# Altium PCB TRUMAN_PCB.PcbDoc (part 5 of 5)
Units mil, origin at the board's own origin, x right, y up, seen from the top; angles counter-clockwise.
Board outline 8050 x 5340 mil, 2 copper layers (Top Layer, Bottom Layer); 272 components, 210 nets, 840 pads, 280 vias.
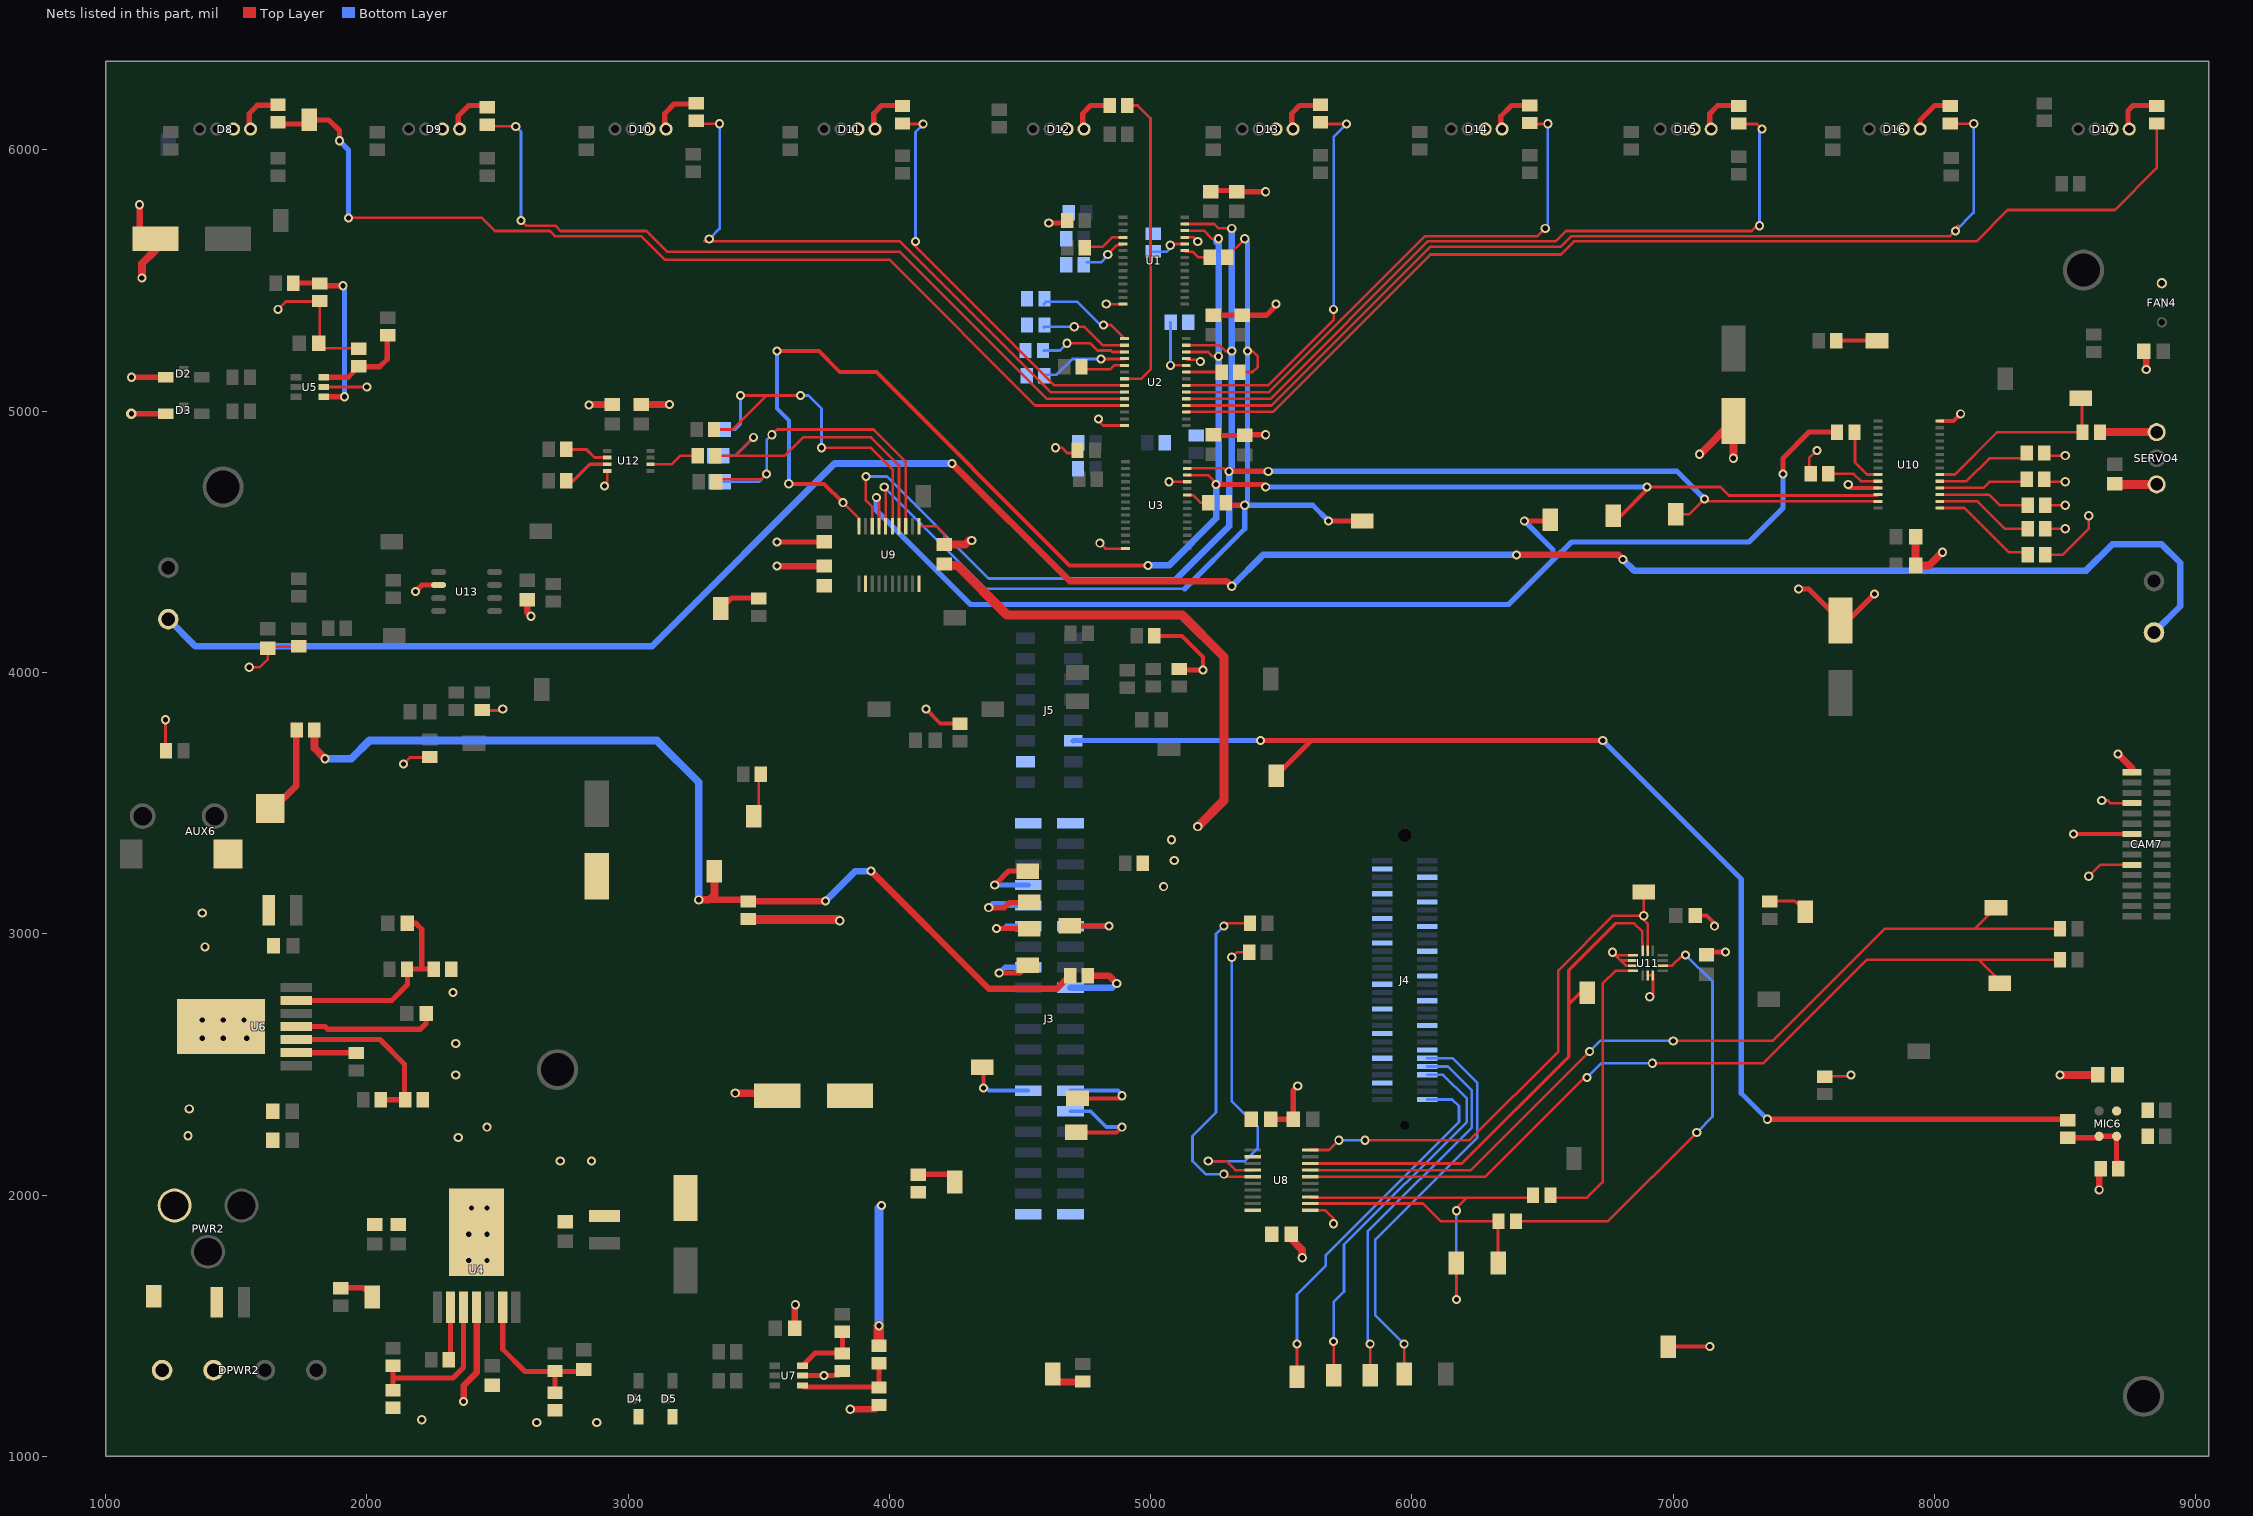
[diagram p3: the nets of this part, all layers, seen from the top]

## Via types
v1: diameter 35, hole 20, Top Layer to Bottom Layer, 278 vias
v2: diameter 40, hole 20, Top Layer to Bottom Layer, 1 vias
v3: diameter 45, hole 25, Top Layer to Bottom Layer, 1 vias

## Nets (pads, with @x,y where several pads share a name; then routed paths per layer and width w, separated by ;. In a path a pad name is that pad's centre, name@x,y a point inside that pad or via, vN(x,y) a via of type N, cw(c..) or ccw(c..) an arc to the next point about the centre after c; other vN are vias at no path point) (continued)
GA3: R6.2 U1.4 | length 160.6
  Top Layer w10: R6.2@4750,5625 4755,5630 4816.57,5630 4852.16,5665.59 U1.4@4893.78,5665.59
GA4: R9.2 U1.5 | length 176.6
  Top Layer w10: v1(4835.52,5600) 4870.83,5635.31 4875.31,5635.31 4880,5640 4880,5635.31 4889.09,5635.31 U1.5@4893.78,5640
  Bottom Layer w10: R9.2@4755.43,5570 4810,5570 4835.52,5595.52 v1(4835.52,5600)
GA5: R8.1 U1.24 | length 138.3
  Top Layer w10: v1(5075,5635) 5080,5640 U1.24@5130,5640
  Bottom Layer w10: R8.1@5010,5610 5060,5610 5075,5625 v1(5075,5635)
GI1: R67.1 U11.4 | length 1124.5
  Top Layer w10: R67.1@6530,2000 6540,1990 6670,1990 6730,2050 6730,2810 6778.39,2858.39 U11.4@6845.51,2858.39
GI2: R68.2 U11.9 | length 1682.2
  Top Layer w10: R68.2@6400,1900 6750,1900 v1(7090,2240) ; U11.9@6959.69,2878.07 6995.95,2878.07 7037.14,2919.25 v1(7047.32,2919.25)
  Bottom Layer w10: v1(7047.32,2919.25) 7150,2816.57 7150,2300 v1(7090,2240)
GND: AUX6.2 C1.1 C2.1 C3.1 C4.1 C5.1 C6.1 C7.2 C8.2 C9.2 C10.2 C11.2 C12.1 C13.1 C14.1 C16.1 C17.1 C18.1 C20.1 C21.1 C22.1 C23.1 C24.1 C25.1 C26.2 C27.2 C28.1 C29.1 C30.2 C31.2 C32.1 C33.1 C36.1 C37.1 C38.2 C39.1 C40.1 C41.1 C42.2 C43.1 C45.1 C46.1 C47.2 CAM7.1 CAM7.4 CAM7.7 CAM7.10 D2.1 D3.1 D4.1 D5.1 D8.2 D9.2 D10.2 D11.2 D12.2 D13.2 D14.2 D15.2 D16.2 D17.2 DPWR2.3 DPWR2.4 FAN4.3 GND1.1 GND.1 J3.1 J3.2 J3.39 J3.40 J4.6 J4.12 J4.13 J4.18 J4.19 J4.24 J4.25 J4.30 J4.31 J4.37 J4.40 J4.43 J4.46 J4.49 J4.52 J4.55 J4.58 J5.4 PWR2.2 R1.1 R2.1 R3.1 R4.1 R5.1 R7.1 R8.2 R9.1 R10.1 R12.2 R15.1 R16.1 R18.1 R19.2 R20.1 R29.2 R32.1 R33.1 R34.1 R39.2 R43.1 R45.1 R47.1 R54.2 R55.2 R56.1 R57.1 R58.1 R59.1 R60.1 R61.1 R62.1 R63.2 R71.1 R75.1 R80.1 R87.1 R122.1 SERVO4.3 U1.14 U1.25 U2.14 U2.25 U3.14 U3.25 U4.4 U4.8 U5.5 U6.4 U6.8 U7.5 U8.11 U9.11 U10.14 U10.25 U11.1 U11.2 U11.3 U11.6 U11.7 U12.4 U13.6 | length 10240.7
  Top Layer w10: R54.2@1229.13,3700 v1(1229.13,3819.13) v1@1230,3820 ; v1(1550,4020) 1590,4020 1620,4050 C43.1@1620,4092.6 1626.54,4099.13 R75.1@1740,4099.13 ; v1(1660,5390) 1690,5420 1819,5420 1819,5262.6 C18.1@1816.4,5260 1835.54,5240.87 R32.1@1969,5240.87 ; U5.5@1835.3,5092.6 v1(2000,5092.6) ; v1(2140,3650) 2164.57,3674.57 R71.1@2240,3674.57 ; R80.1@2441.61,3854.57 2514.57,3854.57 v1(2520,3860) ; v1(2910,4713.82) 2920,4723.82 U12.4@2920,4771.61 ; U9.11@4113.54,4560 4180,4560 4210,4530 C33.1@4210,4490 ; v1(4635.93,4860.28) 4659.72,4860.28 4680,4840 R16.1@4719.35,4840 ; v1@4803.32,4959.21 4817.25,4945.28 U2.14@4900,4945.28 ; v1(4805.39,4495) 4826.29,4474.09 U3.14@4903.78,4474.09 ; v1(4830,5410) 4893.46,5410 U1.14@4893.78,5409.68 ; v1(5070,4730) U3.25@5140,4730 ; U1.25@5130,5665.59 5164.41,5665.59 v1(5180,5650) ; U2.25@5136.22,5201.18 5140.91,5196.5 5183.5,5196.5 v1(5190,5190) ; U8.11@5610.47,1942.05 5667.95,1942.05 5700,1910 v1(5700,1890) ; v1(6767.32,2929.25) v1@6779.13,2917.44 ; U11.3@6845.51,2878.07 6818.5,2878.07 6798.82,2897.76 ; U11.2@6845.51,2897.76 6798.82,2897.76 ; U11.1@6845.51,2917.44 v1@6779.13,2917.44 ; U11.6@6902.6,2840.67 U11.7@6922.28,2840.67 ; v1(6910,2758.81) 6922.6,2771.41 U11.7@6922.6,2842.91 ; R63.2@7520.26,4770.81 7520.26,4820.26 v1(7550,4850) ; R57.1@7580,2455.43 7675.43,2455.43 v1(7680,2460) ; R62.1@8420,4830 v1(8500,4830) ; R58.1@8420.87,4460 8430.87,4450 8490,4450 8590,4550 v1(8590,4600) ; R61.1@8420.87,4730 v1(8500,4730) ; R59.1@8425.43,4550 v1(8500,4550) ; R60.1@8425.43,4640 v1(8500,4640) ; v1(8590,3220) 8633.78,3263.78 CAM7.10@8755.83,3263.78 ; v1(8640,3510) 8663.3,3510 8673.3,3500 CAM7.4@8755.83,3500 ; v1@6779.13,2917.44 6798.82,2897.76
  Top Layer w15: v1(4140,3860) 4194.57,3805.43 R55.2@4270,3805.43 ; R122.1@5015.43,4140 5120,4140 5200,4060 v1(5200,4010) ; GND.1@6980,1420 v1(7140,1420) ; C40.1@7084.8,3070 7126.46,3070 7157.32,3039.14 v1(7157.32,3029.25) ; v1(7670,4720) 7670,4706.46 U10.25@7783.78,4706.46 ; U10.14@8020,4962.36 8072.36,4962.36 v1(8100,4990) ; v1@8530,3380 v1(8531.89,3381.89) CAM7.7@8755.83,3381.89
  Top Layer w18: 2211.18,4335 U13.6@2274.33,4335
  Top Layer w20: v2(1099,4990) D3.1@1230.1,4990 ; v1(1099,5130) D2.1@1230.1,5130 ; U6.4@1730,2645 1840,2645 1850,2635 2205,2635 2226,2656 C24.1@2226,2685 ; v1(2186.18,4310) 2211.18,4335 ; v1@3580,4500 C32.1@3750,4500 ; U7.5@3667.19,1309.17 v1(3749.17,1309.17) 3804.6,1309.17 R45.1@3820,1324.57 ; v1(4610,5720) R3.1@4679.13,5720 ; R56.1@5100,4009.61 5100.39,4010 v1(5200,4010) ; C4.1@5239.96,5844.38 C1.1@5339.96,5844.38 ; C6.1@5240,4907.4 C5.1@5360,4907.4 ; C2.1@5240,5367.4 C3.1@5350,5367.4 5442.6,5367.4 5480,5404.8 v1(5480,5410) ; C1.1@5330,5840 v1(5440,5840) ; C5.1@5360,4910 v1(5440,4910) ; C27.2@5450,2290 C27.2@5460,2290 C28.1@5545.2,2290 5545.2,2400 v1(5562.6,2417.4) ; C41.1@7127.32,2919.25 7138.07,2930 v1(7200,2930) ; v1(7480,4320) 7518.78,4320 C7.2@7640,4198.78 7668.78,4198.78 v1(7770,4300)
  Top Layer w25: v1(1130,5790) 1130,5692.68 1162.68,5660 C10.2@1191.22,5660 ; v1(2370,1210) 2370,1270 2420,1320 U4.4@2420,1570 ; C45.1@2613.6,4277.99 2613.6,4229.96 v1(2628.17,4215.39) ; v1(2850,5023.82) 2851.97,5025.79 C46.1@2940,5025.79 ; C42.2@3050,5025.79 v1(3158.03,5025.79) v1@3160,5023.82 ; v1(3570,4407.4) C31.2@3750,4407.4 ; C25.1@3637.4,1490 3637.4,1577.4 v1(3640,1580) ; v1(3850,1180) 3945.43,1180 R47.1@3960,1194.57 ; v1@8634.57,2024.57 v1(8630,2020) 8630,2093.46 R87.1@8636.54,2100 ; v1(8701.98,3688.02) 8755.83,3634.17 CAM7.1@8755.83,3618.11 ; C38.2@8800,5230 8810,5220 v1(8810,5160)
  Top Layer w30: v1(1138.78,5510) 1138.78,5564.36 1191.22,5616.8 C10.2@1191.22,5660 ; v1(3410,2390) C30.2@3572.44,2390 ; C33.1@4210,4490 4290,4490 4305,4505 v1(4315,4505) ; C29.1@5537.4,1850 5537.4,1832.6 5580,1790 v1(5580,1760) ; v1(7100,4835.47) 7103.03,4835.47 C11.2@7230,4962.44 ; v1(7230,4820) C11.2@7230,4940 ; C37.1@7927.4,4520 C36.1@7927.4,4410 7980,4410 v1(8030,4460) ; v1(8480,2460) C47.2@8625.2,2460
  Top Layer w35: C39.1@8690,4722.6 8692.6,4720 SERVO4.3@8850,4720
  Bottom Layer w10: v2@1099,4980 v2(1099,4990)
  other v1: 2650,1130 2880,1130 2210,1140 2390,1750 2460,1750 2390,1850 2460,1850 2400,1950 2460,1950 2740,2130 2860,2130 2350,2220 1315,2227.08 2460,2260 1320,2330 2340,2460 2340,2580 1370,2600 1450,2600 1540,2600 1370,2670 1450,2670 1530,2670 2330,2775 1380,2950 1370,3080 3570,4500 4800,4970
GND_CFILT: codecgnd.1 J5.5 R86.1 | length 5067.9
  Top Layer w20: v1(5420,3740) 5610,3740 ; codecgnd.1@5480,3605 5610,3735 5610,3740 ; v1(6730,3740) 5610,3740 ; v1(7360,2290) 7530.87,2290 7530.43,2290.43 R86.1@8500,2290.43
  Bottom Layer w20: J5.5@4703.74,3738.03 4705.71,3740 v1(5420,3740) ; v1(6730,3740) 7260,3210 7260,2390 v1(7360,2290)
GPIO_D: D.1 J3.26 | length 243
  Top Layer w20: v1(4420,2850) 4500,2850 D.1@4530,2880
  Bottom Layer w20: v1(4420,2850) 4441.89,2871.89 J3.26@4531.5,2871.89
GPIO_G: G.1 J3.29 | length 297.3
  Top Layer w20: G.1@4690,3030 v1(4840,3030)
  Bottom Layer w20: J3.29@4692.91,3029.37 4839.37,3029.37 v1(4840,3030)
GPIO_H: H.1 J3.30 | length 250.4
  Top Layer w20: v1(4410,3020) H.1@4535,3020
  Bottom Layer w20: v1(4410,3020) 4440,3020 4449.37,3029.37 J3.30@4531.5,3029.37
GPIO_J: J3.32 J.1 | length 323.5
  Top Layer w20: v1(4380,3100) 4440,3100 4460,3120 J.1@4535,3120
  Bottom Layer w20: v1(4380,3100) 4394.55,3114.55 4441.67,3114.55 4448.11,3108.11 J3.32@4531.5,3108.11
GPIO_L: J3.34 L.1 | length 277.2
  Top Layer w20: v1(4403.15,3186.85) 4456.3,3240 L.1@4530,3240
  Bottom Layer w20: v1(4403.15,3186.85) J3.34@4531.5,3186.85
GYRO_INT1: GINT1.1 R67.2 U8.13 | length 1404.6
  Top Layer w10: U8.13@5610.47,1993.23 5613.7,1990 6210,1990 ; v1(6170,1600) GINT1.1@6170,1740 ; v1(6170,1940) 6170,1950 6210,1990 ; R67.2@6463.07,2000 6453.07,1990 6210,1990
  Bottom Layer w10: v1(6170,1600) v1(6170,1940)
GYRO_INT2: GINT2.1 R68.1 U8.12 | length 907
  Top Layer w10: U8.12@5610.47,1967.64 6042.36,1967.64 6110,1900 6329.13,1900 6329.13,1740.87 GINT2.1@6330,1740
heaphones_break: AUX6.3 R81.1 | length 350.5
  Top Layer w25: AUX6.3@1632.6,3469.53 1729.13,3566.06 R81.1@1729.13,3780
I2C0_SCL: SCL0.1 U8.20 U11.13 | length 2061.2
  Top Layer w10: U8.20@5610.47,2172.36 5682.36,2172.36 v1(5720,2210) ; v1(5820,2210) 6220,2210 6560,2550 6560,2860 6769.25,3069.25 v1(6887.32,3069.25) ; SCL0.1@6887.32,3160 v1(6887.32,3069.25) ; U11.13@6902.91,2935.16 6902.91,3037.09 6887.32,3052.68 v1(6887.32,3069.25)
  Bottom Layer w10: v1(5720,2210) v1(5820,2210)
I2C0_SDA: SDA0.1 U8.18 U11.14 | length 2036.3
  Top Layer w10: 6780,3040 6850,3040 6881.91,3008.09 6881.91,2963.66 ; U11.14@6882.91,2935.16 6882.91,2963.66
  Top Layer w12: U8.18@5610.47,2121.18 6191.18,2121.18 6600,2530 6600,2730 ; SDA0.1@6680,2790 6660,2790 6600,2730 ; 6780,3040 6600,2860 6600,2730
I2C1_SCL: SCL1.1 U1.26 U2.26 U3.26 U9.20 U10.26 | length 7196.2
  Top Layer w10: v1(3822.26,4650) 3883.23,4589.03 U9.20@3883.23,4560 ; U1.26@5130,5691.18 5203.84,5691.18 5235.02,5660 v1(5260,5660) ; U2.26@5136.22,5226.77 5219.68,5226.77 5236.46,5210 v1(5260,5210) ; U3.26@5140,4755.59 5218.94,4755.59 5250,4724.53 v1(5250,4720) ; v1(6900,4710) 7180,4710 7212.5,4677.5 7780.41,4677.5 U10.26@7783.78,4680.87
  Top Layer w15: v1(3570,5230) 3730,5230 3810,5150 3950,5150 4690,4410 v1(4990,4410) ; v1(3614.71,4722.26) 3750,4722.26 v1(3822.26,4650) ; SCL1.1@6770,4600 6800,4600 6900,4700 v1(6900,4710)
  Top Layer w20: v1(5250,4720) 5430,4720 v1(5440,4710)
  Bottom Layer w15: v1(3570,5230) 3570,5010 3615.65,4964.35 v1@3615.65,4723.21
  Bottom Layer w20: v1(5440,4710) v1(6900,4710)
  Bottom Layer w25: v1(4990,4410) 5070,4410 5250,4590 v1(5250,4720) 5260,4720 v1(5260,5210) 5260,5640 5250,5650 v1(5260,5660)
I2C1_SDA: SDA1.1 U1.27 U2.27 U3.27 U9.18 U10.27 | length 6169.2
  Top Layer w10: v1(3910,4750) 3910,4657.57 3934.41,4633.16 U9.18@3934.41,4560 ; U1.27@5130,5716.77 5243.23,5716.77 5260,5700 v1(5310,5700) ; U2.27@5136.22,5252.36 5136.22,5252.01 5263.95,5252.01 5285.96,5230 v1(5310,5230) ; U3.27@5140,4781.18 5278.82,4781.18 5290,4770 v1(5300,4770) ; SDA1.1@7010,4605 7060.98,4605 v1(7120,4664.02) 7128.75,4655.28 U10.27@7783.78,4655.28
  Top Layer w20: v1(5300,4770) v1@5440,4770
  Bottom Layer w10: v1(3910,4750) 3990,4750 4380,4360 5100,4360
  Bottom Layer w20: v1(5450,4770) 7014.02,4770 v1(7120,4664.02)
  Bottom Layer w25: 5100,4360 5300,4560 v1(5300,4770) 5310,4780 v1(5310,5230) v1(5310,5700)
I2C2_SCL: R88.1 SCL2.1 U8.17 | length 3385.6
  Top Layer w10: U8.17@5610.47,2095.59 6225.59,2095.59 v1(6680,2550) ; v1(7000,2590) 7380,2590 7810,3020 8155,3020 ; SCL2.1@8235,3100 8155,3020 ; R88.1@8500,3020 R88.1@8480,3020 8155,3020
  Bottom Layer w10: v1(6680,2550) 6720,2590 v1(7000,2590)
I2C2_SDA: R89.1 SDA2.1 U8.16 | length 3388
  Top Layer w10: U8.16@5610.47,2070 6280,2070 6660,2450 v1(6670,2450) ; v1(6920,2504.7) 7344.7,2504.7 7740,2900 8170,2900 ; SDA2.1@8280,2790 8170,2900 ; R89.1@8499.13,2900 R89.1@8480,2900 8170,2900
  Bottom Layer w10: v1(6670,2450) 6724.7,2504.7 v1(6920,2504.7)
LED_CNTRL: LEDCNTRL.1 R11.2 R14.2 R21.2 U9.16 | length 3730.4
  Top Layer w10: v1@3977.8,4702.2 v1@3980,4704.41 ; v1(3980,4710) v1@3980,4704.41 ; U9.16@3985.59,4560 3985.59,4694.41 3980,4700 v1@3980,4704.41 ; R11.2@5292.72,5592.72 v1(5360,5660) ; R14.2@5340.87,5150 5390,5150 5410,5170 5410,5210 5390,5230 v1(5370,5230)
  Top Layer w20: R21.2@5280,4650 5290,4640 v1(5360,4640) ; v1(5680,4580) LEDCNTRL.1@5810,4580
  Bottom Layer w10: v1(3980,4710) 4370,4320 5130,4320
  Bottom Layer w20: 5130,4320 5360,4550 v1(5360,4640) ; v1(5360,5660) 5370,5650 v1(5370,5230) 5370,4650 v1(5360,4640) ; v1(5680,4580) 5620,4640 v1(5360,4640)
LEDOEB: R21.1 U3.23 | length 81.1
  Top Layer w10: U3.23@5140,4678.82 5161.18,4678.82 5190,4650 R21.1@5209.13,4650
LEDOEG: R11.1 U1.23 | length 104.7
  Top Layer w10: U1.23@5130,5614.41 5134.69,5609.72 5161.73,5609.72 5181.46,5590 R11.1@5224.57,5590
LEDOER: R14.1 U2.23 | length 133.8
  Top Layer w10: U2.23@5136.22,5150 R14.1@5270,5150
LineIn_Detect: lineindet.1 R52.1 R81.2 R83.1 | length 3896.6
  Top Layer w25: 3310,3130 R83.1@3455.43,3130 ; R83.1@3460,3125.43 v1(3755.43,3125.43) ; v1(3930,3240) 4380,2790 4640,2790 R52.1@4690,2840
  Top Layer w30: R81.2@1800,3780 1800,3710 v1(1840,3670) ; v1(3270,3130) 3310,3130 3330,3150 lineindet.1@3330,3240 ; R83.1@3455.43,3130 R83.1@3460,3125.43
  Bottom Layer w25: v1(3755.43,3125.43) 3870,3240 v1(3930,3240)
  Bottom Layer w30: v1(1840,3670) 1940,3670 2010,3740 3110,3740 3270,3580 v1(3270,3130)
LINEIN_R: J3.23 R52.2 | length 305.6
  Top Layer w25: R52.2@4760.87,2840 4840,2840 v1(4870,2810)
  Bottom Layer w25: J3.23@4692.91,2793.15 4853.15,2793.15 v1(4870,2810)
LS_EXP_1P8: C27.1 C29.2 C30.1 C31.1 C33.2 FUSE3.1 R44.2 R53.1 R83.2 U8.2 U8.10 U9.2 U9.10 | length 2788.8
  Top Layer w35: R83.2@3460,3054.57 3805.43,3054.57 v1(3810,3050) ; C33.2@4224.01,4410 4260,4410 4450,4220 5120,4220 5280,4060 5280,3510 v1(5180,3410)
  Top Layer w40: C30.1@3848.78,2380 C30.1@3852.91,2384.13 ; R44.2@3960,1425.43 v1(3960,1500)
  Bottom Layer w35: v1(3960,1500) 3960,1950 v1(3970,1960)
  other v1: 5049.61,3180.39 5090,3280 5080,3360
MIC_GND: MIC6.2 MIC6.3 R86.2 R87.2 | length 262.7
  Top Layer w20: 8540,2219.57 8624.57,2219.57 MIC6.3@8630,2225 MIC6.2@8696.93,2225 8696.93,2133.5 R87.2@8705.43,2125
MIC_SUPPLY: C47.1 MIC6.1 R84.1 R85.1 | length 4.5
  Top Layer w20: MIC6.1@8696.93,2321.85 MIC6.1@8700.08,2325
MISOR: R76.1 U12.6 | length 192.8
  Top Layer w10: U12.6@3085.35,4797.2 3167.2,4797.2 3200,4830 R76.1@3264.57,4830
NetR22_2: 3V3.1 R22.2 | length 151.7
  Top Layer w12: R22.2@7370,3125.43 7464.57,3125.43 3V3.1@7505,3085
NetR23_2: 12V1.1 R23.2 | length 134.7
  Top Layer w20: R23.2@1900,1645.43 1984.57,1645.43 12V1.1@2020,1610
NetR24_1: 3V31.1 R24.1 | length 127.6
  Top Layer w25: 3V31.1@4625,1315 4655.43,1284.57 R24.1@4740,1284.57
NetR25_2: 5V2.1 R25.2 | length 161.7
  Top Layer w20: 5V2.1@3355,4245 3395.43,4285.43 R25.2@3500,4285.43
NetR37_1: 5V1.1 R37.1 | length 154.6
  Top Layer w15: R37.1@7625.43,5270 5V1.1@7780,5270
NetR49_2: 12V.1 R49.2 | length 172.4
  Top Layer w10: 12V.1@3480,3450 3500,3470 3500,3600 R49.2@3510,3610
NetR53_2: 1V8.1 R53.2 | length 152.4
  Top Layer w20: R53.2@4110,2080 4220,2080 1V8.1@4250,2050
NetR78_2: R78.2 U12.3 | length 180.8
  Top Layer w12: R78.2@2765.43,4733.82 2790,4733.82 2853.39,4797.2 U12.3@2920,4797.2
NetR79_2: R79.2 U12.2 | length 167.4
  Top Layer w12: R79.2@2765.43,4853.82 2840,4853.82 2871.02,4822.8 U12.2@2920,4822.8
NetSPKR6_2: SPKR6.2 SPKR7.1 | length 8681.1
  Top Layer w25: v1(4240,4800) 4690,4350 5290,4350 v1(5310,4330) ; v1(6400,4450) 6790,4450 v1(6807.08,4432.92)
  Bottom Layer w25: SPKR6.2@1240,4204.36 1344.36,4100 3090,4100 3790,4800 v1(4240,4800) ; v1(5310,4330) 5430,4450 v1(6400,4450) ; v1(6807.08,4432.92) 6850,4390 8580,4390 8680,4490 8870,4490 8940,4420 8940,4253.15 SPKR7.1@8840,4153.15
PWM_CNTRL: PWMCNTRL.1 R64.2 U9.17 | length 4677.7
  Top Layer w10: v1@3955.37,4675.37 v1(3950,4670) 3960,4660 U9.17@3960,4560
  Top Layer w20: v1(6430,4580) 6525,4580 PWMCNTRL.1@6530,4585 ; v1(7420,4760) 7420,4820 7520,4920 R64.2@7624.57,4920
  Bottom Layer w20: v1(3950,4670) 3950,4620 4310,4260 6370,4260 6540,4430 ; v1(6430,4580) 6540,4470 6540,4430 ; v1(7420,4760) 7420,4630 7290,4500 6610,4500 6540,4430
R_LED_0: R90.1 RLED.1 U2.11 | length 3886.6
  Top Layer w10: v1@1940,5740 2440,5740 2490,5690 2700,5690 2720,5670 3050,5670 3140,5580 4000,5580 4557.95,5022.05 U2.11@4900,5022.05
  Top Layer w20: R90.1@1645,6099.13 1764.13,6099.13 RLED.1@1780,6115 1854.22,6115 1895,6074.22 v1(1895,6035)
  Bottom Layer w20: v1@1890,6030 v1(1895,6035) 1930,6000 v1(1930,5740)
R_LED_1: R96.1 U2.9 | length 2428.2
  Top Layer w10: R96.1@3260,6100 v1(3350,6100) ; v1(3310.55,5659.45) 3310.55,5668.27 3292.29,5650 4040,5650 4616.77,5073.23 U2.9@4900,5073.23
  Bottom Layer w10: v1(3310.55,5659.45) 3350,5698.89 v1(3350,6100)
R_LED_2: R102.1 U2.7 | length 1185.5
  Top Layer w10: U2.7@4900,5124.41 4964.41,5124.41 5000,5160 5000,5566.57 4999.13,5567.43 4999.13,6120.87 4950,6170 R102.1@4910,6170
R_LED_3: R108.1 U2.20 | length 2118.4
  Top Layer w10: U2.20@5136.22,5073.23 5453.23,5073.23 6050,5670 6480,5670 v1(6510,5700) ; R108.1@6439.53,6099.13 6519.13,6099.13 v1(6520,6100)
  Bottom Layer w10: v1(6510,5700) 6520,5710 v1(6520,6100)
R_LED_4: R114.1 U2.18 | length 3783.6
  Top Layer w10: U2.18@5136.22,5022.05 5462.05,5022.05 6070,5630 6570,5630 6610,5670 8060,5670 v1(8080,5690) 8080,5700 8090,5710 ; R114.1@8050,6100 v1(8150,6100)
  Bottom Layer w10: v1(8080,5690) 8150,5760 v1(8150,6100)
R_LED_5: R117.1 U2.17 | length 4285.5
  Top Layer w10: U2.17@5136.22,4996.46 5136.22,4997.36 5467.36,4997.36 6070,5600 6570,5600 6620,5650 8160,5650 8280,5770 8690,5770 8850,5930 8850,6088.27 8860.87,6099.13 R117.1@8850,6099.13
R_LED_6: R91.1 U2.10 | length 3080.9
  Top Layer w10: R91.1@2450,6090 v1(2570,6090) ; v1(2590,5730) 2610,5710 2721.63,5710 2741.63,5690 3070,5690 3150,5610 4040,5610 4602.36,5047.64 U2.10@4900,5047.64
  Bottom Layer w10: v1(2570,6090) 2590,6070 v1(2590,5730)
R_LED_7: R97.1 U2.8 | length 1590.6
  Top Layer w10: R97.1@4050,6099.13 v1(4129.13,6099.13) v1@4128.27,6100 ; v1(4100,5650) 4090,5640 4630,5100 4898.82,5100 U2.8@4900,5098.82
  Bottom Layer w10: v1(4100,5650) 4100,6068.27 4130,6098.27 v1(4129.13,6099.13)
R_LED_8: R103.1 U2.21 | length 1546.4
  Top Layer w10: U2.21@5136.22,5098.82 5448.82,5098.82 5700,5350 v1(5700,5390) ; R103.1@5640,6099.13 v1(5749.13,6099.13)
  Bottom Layer w10: v1(5700,5390) 5700,6050 v1(5749.13,6099.13)
R_LED_9: R109.1 U2.19 | length 2964.3
  Top Layer w10: U2.19@5136.22,5047.64 5457.64,5047.64 6060,5650 6550,5650 6590,5690 7300,5690 7330,5720 v1(7330,5710) ; R109.1@7240,6099.13 7320.87,6099.13 v1(7340,6080)
  Bottom Layer w10: v1(7330,5710) 7330,6070 v1(7340,6080)
R_Line_0: D8.1 R90.2 | length 162.8
  Top Layer w20: D8.1@1550,6080 1550,6140 1580.87,6170.87 R90.2@1640,6170.87
R_Line_1: D10.1 R96.2 | length 164.7
  Top Layer w20: D10.1@3140,6080 3140,6140 3175.43,6175.43 3230,6175.43
R_Line_2: D12.1 R102.2 | length 152.4
  Top Layer w20: D12.1@4740,6080 4740,6140 4770,6170 R102.2@4820,6170
R_Line_3: D14.1 R108.2 | length 165.6
  Top Layer w20: D14.1@6340,6080 6340,6129.14 6380.86,6170 R108.2@6439.53,6170
R_Line_4: D16.1 R114.2 | length 172.5
  Top Layer w20: D16.1@7945,6080 7945,6114.51 8000.49,6170 R114.2@8060,6170
R_Line_5: D17.1 R117.2 | length 158.3
  Top Layer w20: D17.1@8740,6080 8740,6150 8760,6170 8820,6170
R_Line_6: D9.1 R91.2 | length 166.6
  Top Layer w20: D9.1@2350,6080 2350,6130 2390,6170 R91.2@2450,6170
R_Line_7: D11.1 R97.2 | length 182.4
  Top Layer w20: D11.1@3940,6080 3940,6140 3970,6170 R97.2@4050,6170
R_Line_8: D13.1 R103.2 | length 162.4
  Top Layer w20: D13.1@5540,6080 5540,6140 5570,6170 R103.2@5630,6170
R_Line_9: D15.1 R109.2 | length 182.4
  Top Layer w20: D15.1@7140,6080 7140,6140 7170,6170 R109.2@7250,6170
RA0: R2.2 U2.1 | length 370.8
  Top Layer w10: v1(4818.87,5330) 4847.95,5330 U2.1@4900,5277.95
  Bottom Layer w10: R2.2@4590.87,5410 4599.3,5418.44 4719.3,5418.44 4807.74,5330 v1(4818.87,5330)
RA1: R4.2 U2.2 | length 340.6
  Top Layer w10: v1(4707.32,5323.14) 4746.86,5323.14 4817.5,5252.5 4855.78,5252.5 4855.92,5252.36 U2.2@4900,5252.36
  Bottom Layer w10: R4.2@4590,5320 4593.14,5323.14 v1(4707.32,5323.14)
RA2: R7.2 U2.3 | length 335.2
  Top Layer w10: v1(4680,5260) 4769.04,5260 4796.54,5232.5 4847.5,5232.5 4853.23,5226.77 U2.3@4900,5226.77
  Bottom Layer w10: R7.2@4589.98,5232.51 4652.51,5232.51 v1(4680,5260)
RA3: R10.2 U2.4 | length 335.3
  Top Layer w10: v1(4810,5200) 4898.82,5200 U2.4@4900,5201.18
  Bottom Layer w10: R10.2@4590,5140 4640,5140 4700,5200 v1(4810,5200)
RA4: R13.2 U2.5 | length 175.2
  Top Layer w10: R13.2@4735.43,5170 4745.43,5160 4844.52,5160 4860.11,5175.59 U2.5@4900,5175.59
RA5: R12.1 U2.24 | length 225.5
  Top Layer w10: v1(5075.59,5175.59) U2.24@5136.22,5175.59
  Bottom Layer w10: R12.1@5074.57,5340 5075.59,5338.98 v1(5075.59,5175.59)
REGFB1: C15.1 R27.1 R29.1 U4.6 | length 576.5
  Top Layer w20: U4.6@2520,1570 2520,1410 2605.43,1324.57 R27.1@2720,1324.57 ; R29.1@2720,1245.43 R27.1@2720,1324.57 ; C15.1@2821.97,1324.57 R27.1@2720,1324.57
REGFB2: C19.1 R38.1 R39.1 U6.6 | length 826.2
  Top Layer w20: U6.6@1730,2745 2095,2745 2155.43,2805.43 2155.43,2865 2210,2865 ; C19.1@2154.8,3040 2187.6,3040 2210,3017.6 2210,2865 ; R39.1@2254.57,2865 2210,2865
RON1: R31.2 U4.2 | length 195.4
  Top Layer w20: R31.2@2320,1374.57 U4.2@2320,1570
RON2: R41.2 U6.2 | length 230
  Top Layer w20: U6.2@1730,2545 R41.2@1960,2545
SCLR2: R50.2 U8.4 | length 1241.2
  Top Layer w10: v1(5220,2130) 5290,2130 5324.41,2095.59 U8.4@5390,2095.59 ; v1(5310,2910) 5330,2930 R50.2@5376.54,2930
  Bottom Layer w10: v1(5220,2130) 5360,2130 5410,2180 5410,2260 5310,2360 v1(5310,2910)
SDAR2: R51.2 U8.5 | length 1308.7
  Top Layer w10: v1(5280,2080) 5290,2070 U8.5@5390,2070 ; v1(5280,3030) 5290,3040 R51.2@5380,3040
  Bottom Layer w10: v1(5280,2080) 5210,2080 5160,2130 5160,2226.27 5250,2316.27 5250,3000 v1(5280,3030)
SENSE_1V8: R44.1 R47.2 U7.4 | length 384.6
  Top Layer w20: U7.4@3667.19,1271.77 3673.53,1265.43 3960,1265.43 R44.1@3960,1354.57
SENSE_3V3: R42.1 R45.2 U7.6 | length 252.2
  Top Layer w20: U7.6@3667.19,1346.57 3716.06,1395.43 3820,1395.43 R42.1@3820,1474.57
SENSE_5V: R28.1 R33.2 U5.4 | length 699.8
  Top Layer w20: R28.1@1719.87,5490 1720.73,5490.87 1819,5490.87 1829.87,5480 v1(1909,5480) ; U5.4@1835.3,5055.2 v1(1914.2,5055.2)
  Bottom Layer w20: v1(1909,5480) 1914.2,5474.8 v1(1914.2,5055.2)
SENSE_12V: R26.1 R32.2 U5.6 | length 362.3
  Top Layer w20: U5.6@1835.3,5130 1929,5130 1969,5170 2049,5170 2078.13,5199.13 R26.1@2078.13,5290
Servo_PWM: R66.1 SERVOPWM.1 U10.6 | length 743.7
  Top Layer w10: U10.6@8020,4757.64 8077.64,4757.64 8240,4920 8564.57,4920 8564.57,5045.43 SERVOPWM.1@8560,5050
Servo_R: R66.2 SERVO4.1 | length 214.6
  Top Layer w30: R66.2@8635.43,4920 SERVO4.1@8850,4920
SFA0: R58.2 U10.1 | length 400.3
  Top Layer w10: U10.1@8020,4629.68 8114.46,4629.68 8284.14,4460 R58.2@8350,4460
SFA1: R59.2 U10.2 | length 378.2
  Top Layer w10: U10.2@8020,4655.28 8164.72,4655.28 8270,4550 R59.2@8354.57,4550
SFA2: R60.2 U10.3 | length 351.5
  Top Layer w10: U10.3@8020,4680.87 8209.13,4680.87 8250,4640 R60.2@8354.57,4640
SFA3: R61.2 U10.4 | length 339.8
  Top Layer w10: U10.4@8020,4706.46 8186.46,4706.46 8210,4730 R61.2@8350,4730
SFA4: R62.2 U10.5 | length 365.6
  Top Layer w10: U10.5@8020,4732.05 8122.05,4732.05 8210,4820 R62.2@8349.13,4820
SFA5: R63.1 U10.24 | length 199.9
  Top Layer w10: R63.1@7595.43,4760 7690,4760 7717.95,4732.05 U10.24@7783.78,4732.05
SFOER: R64.1 U10.23 | length 223.2
  Top Layer w10: R64.1@7695.43,4920 7695.43,4804.57 7742.36,4757.64 U10.23@7783.78,4757.64
SPI0_CLK: R74.2 SPI0CLK.1 U9.15 | length 1456.7
  Top Layer w10: R74.2@3330.87,4930 3400,4930 3530,5060 ; v1(3430,5060) 3530,5060 ; v1(3660,5060) 3530,5060 ; v1(3740,4860) 3930,4860 4012.5,4777.5 4012.5,4561.32 U9.15@4011.18,4560
  Bottom Layer w10: SPI0CLK.1@3350,4930 3410,4930 3430,4950 v1(3430,5060) ; v1(3660,5060) 3690,5060 3740,5010 v1(3740,4860)
SPI0_CSn: CSN0.1 R77.2 U9.13 | length 1386.7
  Top Layer w10: R77.2@3335.43,4740 3510,4740 v1(3530,4760) ; v1@3540,4900 v1(3550,4910) 3570,4930 3940,4930 4062.36,4807.64 U9.13@4062.36,4560
  Bottom Layer w10: CSN0.1@3350,4730 3500,4730 v1(3530,4760) 3530,4890 v1(3550,4910)
SPI0_MISO: MISO0.1 R76.2 U9.14 | length 1270.8
  Top Layer w10: R76.2@3335.43,4830 3410,4830 ; v1(3480,4900) 3410,4830 ; U9.14@4036.77,4560 4036.77,4793.23 3930,4900 3670,4900 3600,4830 3410,4830
  Bottom Layer w10: MISO0.1@3345,4830 3410,4830 v1(3480,4900)
SPI0_MOSI: J3.14 MOSI0.1 | length 272.1
  Top Layer w15: MOSI0.1@4355,2490 4360,2485 v1(4360,2410)
  Bottom Layer w15: v1(4360,2410) 4360,2420 4380.55,2399.45 J3.14@4531.5,2399.45
SPI1_CLK: J4.9 SPCLK1.1 | length 1468
  Top Layer w10: SPCLK1.1@5840,1310 v1(5840,1430)
  Bottom Layer w10: v1(5840,1430) 5830,1440 5830,1860 6229,2259 6229,2401 6138.03,2491.97 J4.9@6059.06,2491.97
SPI1_CS_N: CSN1.1 J4.7 | length 1449.7
  Top Layer w10: CSN1.1@5700,1310 v1@5700,1430
  Bottom Layer w10: v1(5700,1440) 5700,1590 5740,1630 5740,1810 6210,2280 6210,2370 6119.53,2460.47 J4.7@6059.06,2460.47
SPI1_MISO: J4.11 MISO1.1 | length 1552.2
  Top Layer w10: MISO1.1@5970,1315 v1(5970,1430)
  Bottom Layer w10: v1(5970,1430) 5860,1540 5860,1830 6250.5,2220.5 6250.5,2429.5 6156.54,2523.46 J4.11@6059.06,2523.46
SPI1_MOSI: J4.1 MOSI1.1 | length 1423.5
  Top Layer w10: MOSI1.1@5560,1305 v1(5560,1430)
  Bottom Layer w10: v1(5560,1430) 5560,1620 5670,1730 5670,1770 6180,2280 6180,2340 6154.02,2365.98 J4.1@6059.06,2365.98
UART1_RX: J3.13 RX1.1 | length 364.3
  Top Layer w15: RX1.1@4740,2370 4880,2370 v1(4890,2380)
  Bottom Layer w15: J3.13@4692.91,2399.45 4875.55,2399.45 v1@4895,2380
UART1_TX: J3.11 TX1.1 | length 405.5
  Top Layer w15: TX1.1@4715,2240 4870,2240 v1(4890,2260)
  Bottom Layer w15: J3.11@4692.91,2320.71 4769.29,2320.71 4830,2260 v1(4890,2260)
V_EN_DIV_1: R30.1 R34.2 U4.3 | length 605.7
  Top Layer w20: R34.2@2100,1255.43 2100,1300 ; R30.1@2100,1344.57 2100,1300 ; U4.3@2370,1570 2370,1340 2330,1300 2100,1300
V_EN_DIV_2: R40.1 R43.2 U6.3 | length 678.3
  Top Layer w20: U6.3@1730,2595 2050,2595 2144.57,2500.43 2144.57,2365 R40.1@2055.43,2365
pads on no net: AUX6.MH1 AUX6.MH2 CAM7.MP D2.TH D3.TH D4.TH D5.TH J3.3 J3.4 J3.5 J3.6 J3.7 J3.9 J3.16 J3.18 J3.20 J3.22 J3.37 J4.3 J4.5 J4.17 J4.20 J4.21 J4.22 J4.23 J4.26 J4.27 J4.28 J4.29 J4.33 J4.35 J4.36 J4.38 J4.39 J4.41 J4.42 J4.44 J4.45 J4.47 J4.48 J4.50 J4.51 J4.53 J4.54 J4.56 J4.57 J4.59 J4.60 J4.MH1 J4.MH2 J5.3 J5.8 J5.10 J5.13 J5.14 J5.15 J5.16 MH2.MH MH3.MH MH4.MH MH5.MH PWR2.3 U1.6 U1.12 U1.13 U1.15 U1.16 U1.22 U2.6 U2.12 U2.13 U2.15 U2.16 U2.22 U3.6 U3.12 U3.13 U3.15 U3.16 U3.22 U10.8 U10.9 U10.10 U10.11 U10.12 U10.13 U10.15 U10.16 U10.17 U10.18 U10.19 U10.20 U10.21 U10.22 U11.10 U11.11 U13.2 U13.7

## Polygon pours and split planes (outlines as drawn)
3V3 on Top Layer "3V3_L01_P038" (solid, remove dead copper, pour order 38): 5500,2130 5520,2130 5520,4060 9030,4060 9030,4000 9030,1030 5520,1030 5500,1050 5500,1840
12V_BATTIN on Top Layer "12V_BATTIN_L01_P044" (solid, remove dead copper, pour order 44): 2120,4090 2120,3370.21 3720,3369.91 3720,4090 3380,4090
5V on Top Layer "5V_L01_P034" (solid, remove dead copper, pour order 34): 1550.2,3490 1010,3490 1010,6320 9030,6320 9030,4060 2110,4060 2110,3490
GND on Top Layer "GND_L01_P030" (solid, pour order 30): 1940,3360 1940,1840 2440,1840 2440,1870 2900,1870 2910,1860 2920,1870 3710,1870 3710,3360
3V3 on Top Layer "3V3_L01_P026" (solid, pour order 26): 2550,1850 8990,1850 8990,1020 2550,1020
GND on Top Layer "GND_L01_P024" (solid, pour order 24): 2020,1220 2302,1220 2410,1310 2570,1310 2654,1200 2814.67,1200 2954.67,1350 3290,1350 3290,1000 2020,1000
LS_EXP_1P8 on Top Layer "LS_EXP_1P8_L01_P006" (solid, remove dead copper, pour order 6): 3680,4420 3680,1780 5510,1780 5510,4120 4434.62,4120 4434.62,4420
MIC_SUPPLY on Top Layer "MIC_SUPPLY_L01_P002" (solid, remove dead copper, pour order 2): 8680,2530 8680,2170 8850,2170 8850,2480 8800,2530
GND on Top Layer "GND_L01_P016" (solid, remove dead copper, pour order 16): 2170,2765 2210,2805 2290,2805 2290,3025 2400,3025 2400,2255 2360,2215 2200,2215 2200,2495 2170,2525
12V_BATTIN on Top Layer "12VPOUR" (solid, remove dead copper, pour order 10): 1680,2070 1680,2820 1920,2820 1930,2810 2020,2810 2020,2070
GND on Top Layer "GND_5VREG" (solid, pour order 12): 1680,2120 1680,3480 1010,3480 1010,2120
5V on Top Layer "5VPOUR" (solid, pour order 14): 1680,2892.05 1680,3490 2120,3490 2120,2770 1680,2770
GND on Top Layer "GND_L01_P018" (solid, pour order 18): 1010,1020 1010,2180 1020,2190 1470,2190 1470,1020
12V_BATTIN on Top Layer "12V_BATTIN_L01_P020" (solid, pour order 20): 1930,2140 1490,2140 1490,1010 2020,1010 2020,1380 2287.52,1380 2287.52,1840 1930,1840
12V_BATTIN on Top Layer "12V_BATTIN_L01_P022" (solid, pour order 22): 1910,1660 2300,1660 2290,1650 2290,1330 2230,1330 2170,1390 1920,1390 1910,1400
GND on Bottom Layer "GND_L02_P042" (solid, remove dead copper, pour order 42): 1000,1000 1000,6340 9050,6340 9050,1000
LS_EXP_1P8 on Bottom Layer "LS_EXP_1P8_L02_P004" (solid, remove dead copper, pour order 4): 4830,3470 4810,3450 4810,1670 4810,1610 5490,1610 5490,2660 5490,3470
LS_EXP_1P8 on Bottom Layer "LS_EXP_1P8_L02_P008" (solid, remove dead copper, pour order 8): 4290,3110 4290,2560 5750,2560 5750,3110

## Other copper
Top Layer:
  pour cut-out: 1320,4840 1320,4580 1590,4580 1590,4840
  pour cut-out: 8440,5660 8440,5410 8700,5410 8700,5660
  pour cut-out: 8650,1360 8650,1100 8950,1100 8950,1360
  pour cut-out: 2580,2620 2580,2340 2880,2340 2880,2620
  pour cut-out: 2190,2080 2190,1660 2547.6,1660 2550,1657.6 2640,1747.6 2640,2060 2620,2080
  pour cut-out: 1230,2865 1230,2415 1260,2445 1660,2445 1660,2855 1650,2865
  pour cut-out: 1174.77,5707.16 1174.77,5381.32 1173.45,5380

## Silkscreen, mask and mechanical layers (free items; w line width, h text height)
Top Overlay:
  drawing of 2014 lines, arcs and shapes, not listed
  text "msbtrange | ejheinz" at 7740,1110 h35.43
Mechanical 7:
  lines w10: 1000,1000 9050,1000 9050,6340 1000,6340 1000,1240 1000,1000

## Text inside footprints (layer, text, board x,y; h text height)
C7: Top Overlay "+" at 7485,3820 h39.37 r90
C8: Top Overlay "+" at 3060,1660 h39.37 r90
C9: Top Overlay "+" at 3035,3598.78 h39.37 r270
C10: Top Overlay "+" at 1540,5530 h39.37 r180
C11: Top Overlay "+" at 7385,5341.22 h39.37 r270
C30: Top Overlay "+" at 3908.78,2240 h39.37 r180
CAM7: Top Overlay "pins" at 8640,3670 h39.37 r90
DPWR2: Top Overlay "+" at 1601.3,1110 h39.37; Top Overlay "+" at 1801.3,1110 h39.37; Top Overlay "-" at 1201.3,1110 h39.37; Top Overlay "-" at 1401.3,1110 h39.37
FAN4: Top Overlay "R(1)" at 8770,5320 h19.68 r90; Top Overlay "Bu" at 8770,5410 h19.68 r90; Top Overlay "Bk" at 8770,5470 h19.68 r90
PWR2: Top Overlay "board edge" at 1010,2080 h25 r270
SERVO4: Top Overlay "b" at 8925,4710 h25; Top Overlay "w" at 8925,4915 h25
SPKR6: Top Overlay "-" at 1030,4216.21 h39.37 r270; Top Overlay "+" at 1030,4416.21 h39.37 r270
SPKR7: Top Overlay "-" at 8990,4480 h39.37 r90; Top Overlay "+" at 8980,4010 h39.37 r90
U4: Top Overlay "1" at 2190,1440 h25
U6: Top Overlay "1" at 1860,2420 h25 r90
U11: Top Overlay "*" at 6802.6,3002.91 h19.68